# Altium PCB PCB8.PcbDoc
Units mil, origin at the board's own origin, x right, y up, seen from the top; angles counter-clockwise.
Board outline 3940 x 3150 mil, 2 copper layers (Top Layer, Bottom Layer); 95 components, 61 nets, 314 pads, 77 vias.
Unrouted connection lines stored in the file: 1.
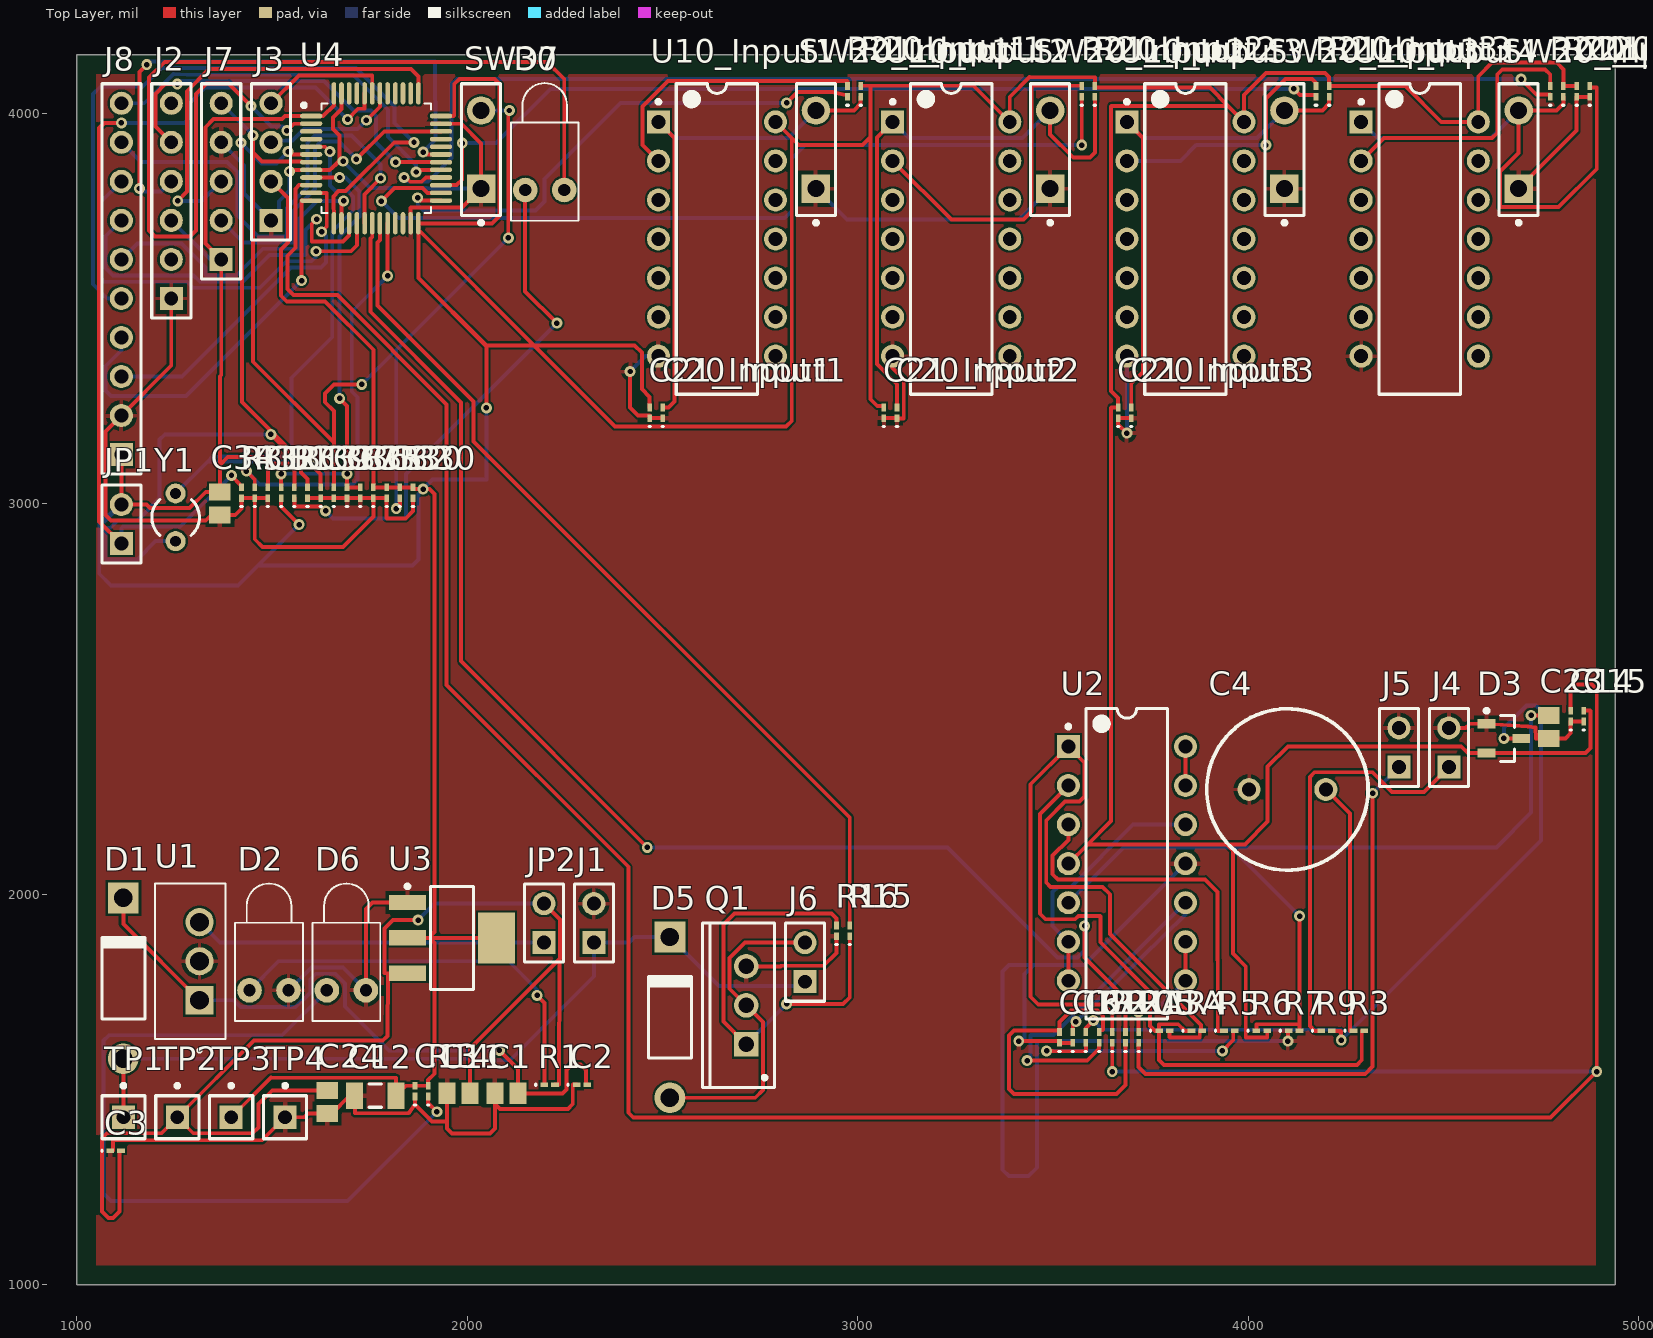
[diagram p0: Top Layer view]
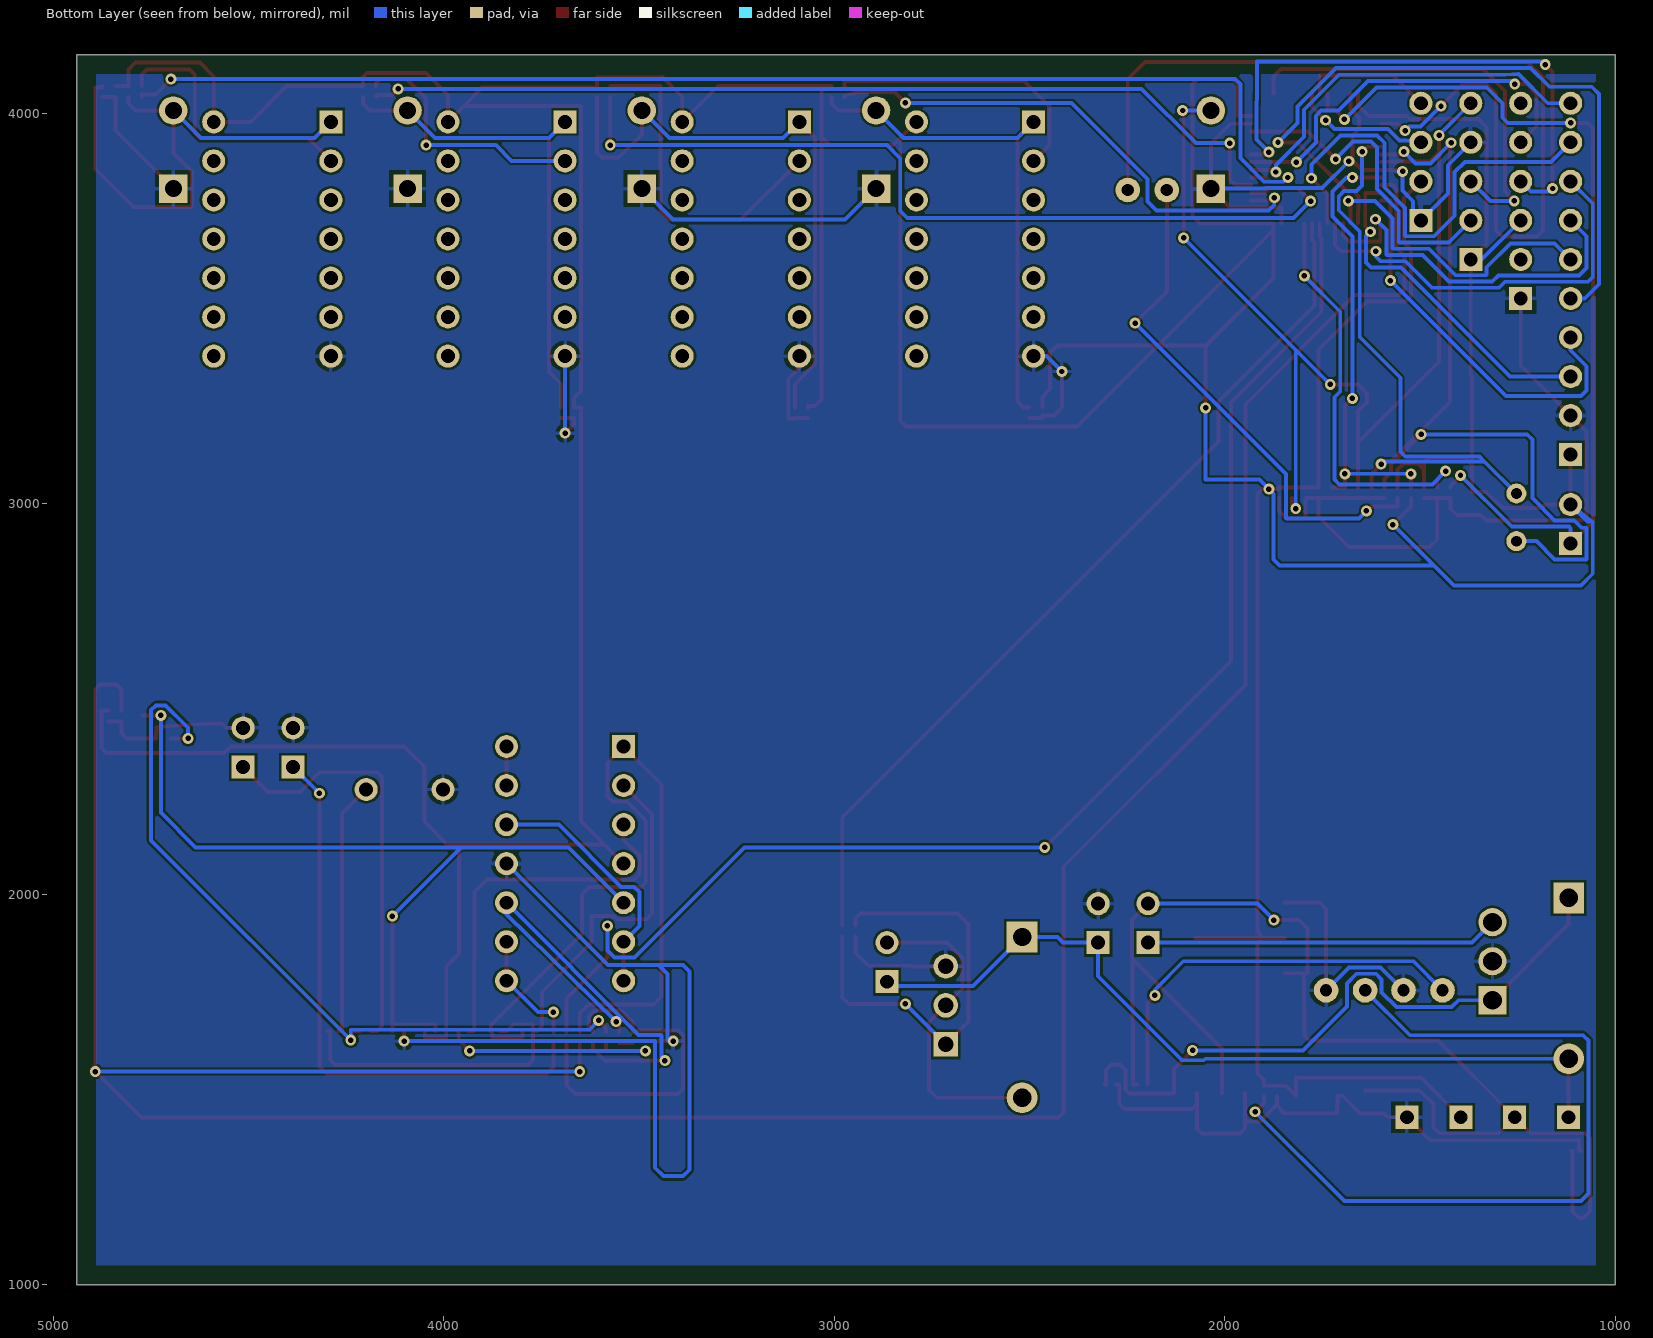
[diagram p1: Bottom Layer view, seen from below]

## Layer stack, top to bottom
Top Solder: solder mask 0.4, Solder Resist, Dk 3.5
Top Layer: signal copper 1.4
Dielectric 1: dielectric 12.6, FR-4, Dk 4.8
Bottom Layer: signal copper 1.4
Bottom Solder: solder mask 0.4, Solder Resist, Dk 3.5

## Board outline
1000,1000 1000,4150 4940,4150 4940,1000

## Design rules (kind name [scope] priority, off if disabled: settings)
Clearance [All] p1: gap=6 ignorepadtopadclearanceinfootprint=FALSE
HoleSize [All] p1: absolutevalues=TRUE maxlimit=250 minlimit=8 maxpercent=80.000 minpercent=20.000
MinimumSolderMaskSliver [All] p1: minsoldermaskwidth=4
PolygonConnect [All] p1: connectstyle=Relief reliefconductorwidth=10 reliefentries=4 polygonreliefangle="90 Angle" airgapwidth=10
RoomDefinition "Room Power (Power)" [InComponentClass('Power') vs True] p1: confinementstyle=ConfineIn formatcopy=TRUE lockcomponents=FALSE outline 1050,1050 2400,1050 2400,2050 1050,2050
RoomDefinition "Room Mcu (Mcu)" [InComponentClass('Mcu') vs True] p2: confinementstyle=ConfineIn formatcopy=TRUE lockcomponents=FALSE outline 1050,2100 2400,2100 2400,4100 1050,4100
RoomDefinition "Room Driver (Driver)" [InComponentClass('Driver') vs True] p3: confinementstyle=ConfineIn formatcopy=TRUE lockcomponents=FALSE outline 2450,1050 3450,1050 3450,1950 2450,1950
RoomDefinition "Room Analog (Analog)" [InComponentClass('Analog') vs True] p4: confinementstyle=ConfineIn formatcopy=TRUE lockcomponents=FALSE outline 3500,1050 4900,1050 4900,2500 3500,2500
RoomDefinition "Room Input1 (Input1)" [InComponentClass('Input1') vs True] p5: confinementstyle=ConfineIn formatcopy=TRUE lockcomponents=FALSE outline 2450,2600 3050,2600 3050,4100 2450,4100
RoomDefinition "Room Input2 (Input2)" [InComponentClass('Input2') vs True] p6: confinementstyle=ConfineIn formatcopy=TRUE lockcomponents=FALSE outline 3050,2600 3650,2600 3650,4100 3050,4100
RoomDefinition "Room Input3 (Input3)" [InComponentClass('Input3') vs True] p7: confinementstyle=ConfineIn formatcopy=TRUE lockcomponents=FALSE outline 3650,2600 4250,2600 4250,4100 3650,4100
RoomDefinition "Room Input4 (Input4)" [InComponentClass('Input4') vs True] p8: confinementstyle=ConfineIn formatcopy=TRUE lockcomponents=FALSE outline 4250,2600 4900,2600 4900,4100 4250,4100
RoutingVias [All] p1: holewidth=14 width=28 viastyle="Through Hole" minholewidth=10 minwidth=20 maxholewidth=28 maxwidth=50
SolderMaskExpansion [All] p1: expansion=0 istentingtop=FALSE
Width [All] p1: maxlimit=50 minlimit=6 preferedwidth=10
28 further rules are at their usual default settings.

## Classes and differential pairs
channel class Input: Input1 Input2 Input3 Input4
component class Power: C1 C2 C3 C11 C12 C13 C24 D1 D2 D6 J1 JP2 R1 R14 TP1 TP2 TP3 TP4 U1 U3
component class Mcu: C30 C31 C32 C33 C34 C35 C36 C37 C38 C39 D7 FB1 J2 J3 J7 J8 JP1 R30 R31 R32 R33 SW30 U4 Y1
component class Input4: C20_Input4 C21_Input4 R20_Input4 R21_Input4 SW20_Input4 U10_Input4
component class Input3: C20_Input3 C21_Input3 R20_Input3 R21_Input3 SW20_Input3 U10_Input3
component class Input2: C20_Input2 C21_Input2 R20_Input2 R21_Input2 SW20_Input2 U10_Input2
component class Input1: C20_Input1 C21_Input1 R20_Input1 R21_Input1 SW20_Input1 U10_Input1
component class Driver: D5 J6 Q1 R15 R16
component class Analog: C4 C5 C14 C15 C16 C17 C22 C23 D3 J4 J5 R3 R4 R5 R6 R7 R9 R10 R11 R12A R13A U2

## Components (designator, comment, footprint, x,y, rotation, side; value= is the part's Value field where it differs from the comment)
C1 "Cap" C0805 2100.24,1490.9 r0 top value=10uF
C2 "Cap" 0603 2293.78,1512.56 r0 top value=100nF
C3 "Cap" 0603 1099.37,1342.95 r0 top value=100nF
C4 "Cap Pol1" RB5-10.5 4100.67,2268.39 r0 top value=47uF
C5 "Cap" 0603 3785.83,1649.96 r0 top value=3.3nF
C11 "Cap" C0805 1977.87,1490.9 r0 top value=10uF
C12 "Cap" C1206 1764.33,1484.01 r0 top value=22uF
C13 "Cap" 0603 1866.02,1495.82 r90 top value=100nF
C14 "Cap" 0603 4825.87,2456.38 r90 top value=1nF
C15 "Cap" 0603 4859.65,2456.38 r90 top value=100nF
C16 "Cap" 0603 3516.89,1633.23 r90 top value=100nF
C17 "Cap" 0603 3550.67,1633.23 r90 top value=100nF
C20_Input1 "Cap" 0603 2500.67,3233.23 r90 top value=100nF (schematic designator C20)
C20_Input2 "Cap" 0603 3100.67,3233.23 r90 top value=100nF (schematic designator C20)
C20_Input3 "Cap" 0603 3700.67,3233.23 r90 top value=100nF (schematic designator C20)
C20_Input4 "Cap" 0603 4875.16,4056.38 r90 top value=100nF (schematic designator C20)
C21_Input1 "Cap" 0603 2466.89,3233.23 r90 top value=100nF (schematic designator C21)
C21_Input2 "Cap" 0603 3066.89,3233.23 r90 top value=100nF (schematic designator C21)
C21_Input3 "Cap" 0603 3666.89,3233.23 r90 top value=100nF (schematic designator C21)
C21_Input4 "Cap" 0603 4841.38,4056.38 r90 top value=100nF (schematic designator C21)
C22 "Cap" 0603 3584.45,1633.23 r90 top value=1uF
C23 "Cap" C0805 4770.43,2428.82 r90 top value=10uF
C24 "Cap" C0805 1640.99,1468.27 r90 top value=10uF
C30 "Cap" 0603 1860.91,3028.5 r90 top value=100nF
C31 "Cap" 0603 1489.33,3028.5 r90 top value=100nF
C32 "Cap" 0603 1793.35,3028.5 r90 top value=100nF
C33 "Cap" 0603 1759.57,3028.5 r90 top value=100nF
C34 "Cap" C0805 1366.34,3000.95 r90 top value=4.7uF
C35 "Cap" 0603 1725.79,3028.5 r90 top value=1uF
C36 "Cap" 0603 1692.01,3028.5 r90 top value=100nF
C37 "Cap" 0603 1658.23,3028.5 r90 top value=100nF
C38 "Cap" 0603 1624.45,3028.5 r90 top value=22pF
C39 "Cap" 0603 1590.67,3028.5 r90 top value=22pF
D1 "Diode 1N4007" DO-41 1119.06,1784.72 r90 top
D2 "LED1" LED-1 1492.14,1753.88 r90 top
D3 "BAT54S" SOT-23_N 4654.96,2399.29 r0 top
D5 "Diode 1N4007" DO-41 2519.06,1684.72 r90 top
D6 "LED1" LED-1 1690.37,1753.88 r90 top
D7 "LED1" LED-1 2198.25,3803.88 r90 top
FB1 "Inductor" 0603 1523.11,3028.5 r90 top value=120R@100MHz
J1 "Header 2" HDR1X2 2324.13,1876.06 r90 top
J2 "Header 6" HDR1X6 1241.81,3526.06 r90 top
J3 "Header 4" HDR1X4 1497.56,3726.06 r90 top
J4 "Header 2" HDR1X2 4514.1,2326.06 r90 top
J5 "Header 2" HDR1X2 4386.22,2326.06 r90 top
J6 "Header 2" HDR1X2 2864.96,1776.06 r90 top
J7 "Header 5" HDR1X5 1369.68,3626.06 r90 top
J8 "Header 10" HDR1X10 1113.94,3126.06 r90 top
JP1 "Header 2" HDR1X2 1113.94,2898.19 r90 top
JP2 "Header 2" HDR1X2 2196.26,1876.06 r90 top
Q1 "IRLZ44N" TO-220AB 2714.25,1715.43 r90 top
R1 "Res1" 0603 2210.79,1512.56 r0 top value=1k
R3 "Res1" 0603 4283.78,1649.96 r0 top value=1k
R4 "Res1" 0603 3868.82,1649.96 r0 top value=6.8k
R5 "Res1" 0603 3951.81,1649.96 r0 top value=100k
R6 "Res1" 0603 4034.8,1649.96 r0 top value=10k
R7 "Res1" 0603 4117.8,1649.96 r0 top value=10k
R9 "Res1" 0603 4200.79,1649.96 r0 top value=1k
R10 "Res1" 0603 3652.01,1633.23 r90 top value=100
R11 "Res1" 0603 3685.79,1633.23 r90 top value=10k
R12A "Res1" 0603 3618.23,1633.23 r90 top value=10k
R13A "Res1" 0603 3719.57,1633.23 r90 top value=100
R14 "Res1" 0603 1899.8,1495.82 r90 top value=1k
R15 "Res1" 0603 2979.57,1906.38 r90 top value=100
R16 "Res1" 0603 2945.79,1906.38 r90 top value=10k
R20_Input1 "Res1" 0603 3007.6,4056.38 r90 top value=10k (schematic designator R20)
R20_Input2 "Res1" 0603 3607.6,4056.38 r90 top value=10k (schematic designator R20)
R20_Input3 "Res1" 0603 4207.6,4056.38 r90 top value=10k (schematic designator R20)
R20_Input4 "Res1" 0603 4807.6,4056.38 r90 top value=10k (schematic designator R20)
R21_Input1 "Res1" 0603 2973.82,4056.38 r90 top value=100 (schematic designator R21)
R21_Input2 "Res1" 0603 3573.82,4056.38 r90 top value=100 (schematic designator R21)
R21_Input3 "Res1" 0603 4173.82,4056.38 r90 top value=100 (schematic designator R21)
R21_Input4 "Res1" 0603 4773.82,4056.38 r90 top value=100 (schematic designator R21)
R30 "Res1" 0603 1827.13,3028.5 r90 top value=10k
R31 "Res1" 0603 1421.77,3028.5 r90 top value=10k
R32 "Res1" 0603 1455.55,3028.5 r90 top value=10k
R33 "Res1" 0603 1556.89,3028.5 r90 top value=1k
SW20_Input1 "SW-PB" SPST-2 2892.99,3907.56 r90 top (schematic designator SW20)
SW20_Input2 "SW-PB" SPST-2 3492.99,3907.56 r90 top (schematic designator SW20)
SW20_Input3 "SW-PB" SPST-2 4092.99,3907.56 r90 top (schematic designator SW20)
SW20_Input4 "SW-PB" SPST-2 4692.99,3907.56 r90 top (schematic designator SW20)
SW30 "SW-PB" SPST-2 2035.2,3907.56 r90 top
TP1 "Plug" PIN1 1119.05,1428.9 r0 top
TP2 "Plug" PIN1 1257.17,1428.9 r0 top
TP3 "Plug" PIN1 1395.28,1428.9 r0 top
TP4 "Plug" PIN1 1533.39,1428.9 r0 top
U1 "LM7805T" TO254P1011X457X1950-3 1290.57,1828.48 r90 top
U2 "MCP6004" DIP-14 3689.53,2078.42 r0 top
U3 "AMS1117-3.3" SOT223_N 1960.9,1888.27 r0 top
U4 "STM32F103C8T6" LQFP48_7x7 1766.38,3885.12 r0 top
U10_Input1 "74HC14" DIP-14 2639.53,3678.42 r0 top (schematic designator U10)
U10_Input2 "74HC14" DIP-14 3239.53,3678.42 r0 top (schematic designator U10)
U10_Input3 "74HC14" DIP-14 3839.53,3678.42 r0 top (schematic designator U10)
U10_Input4 "74HC14" DIP-14 4439.53,3678.42 r0 top (schematic designator U10)
Y1 "XTAL" R38 1252.84,2965.51 r0 top

## Footprints (in the part's own frame and the unit in brackets; to place one, negate y for a bottom-side part, rotate by r counter-clockwise, add the part's x,y. Pads: shape width x height; smd on the part's side, far side on the other; paste and mask are expansions set on the pad)
0603 [mm] "Chip Inductor, Body 0.6x0.3mm, IPC High Density"
  rect 0.5x0.3 smd: 1(-0.35,0) 2(0.35,0)
  silkscreen extent -0.9,-0.05 -0.9,0.05, body extent -0.33,-0.18 0.33,0.18, height 0.55
C0805 [mm] "Chip Capacitor, Body 2.0x1.3mm, IPC High Density"
  rect 1.1x1.4 smd: 1(-0.75,0) 2(0.75,0)
  body extent -1.1,-0.72 1.1,0.72, height 1.4
C1206 [mm] "Chip Capacitor, Body 3.2x1.6mm, IPC High Density"
  rect 1.1x1.7 smd: 1(-1.35,0) 2(1.35,0)
  silkscreen extent -0.4,-0.75 0.4,0.75, body extent -1.7,-0.9 1.7,0.9, height 1.3
DIP-14 [mm] "DIP; 14 Leads; Row Spacing 7.62 mm; Pitch 2.54 mm"
  rect 1.5x1.5 hole 0.9: 1(-3.81,7.62)
  round 1.5 hole 0.9: 2(-3.81,5.08) 3(-3.81,2.54) 4(-3.81,0) 5(-3.81,-2.54) 6(-3.81,-5.08) 7(-3.81,-7.62) 8(3.81,-7.62) 9(3.81,-5.08) 10(3.81,-2.54) 11(3.81,0) 12(3.81,2.54) 13(3.81,5.08) 14(3.81,7.62)
  silkscreen extent -3.93,-10.1 2.65,10.1, body extent -3.6,-10.1 3.6,10.1, height 5.08
DO-41 [mm] "Diode, Axial; Body 5.2 x 2.7 mm (LxDia. max), Lead Dia. 0.86 mm (max)"
  round 2 hole 1.2: 1(-5.23,0)
  rect 2x2 hole 1.2: 2(5.23,0)
  silkscreen extent -2.65,-1.4 2.75,1.4
HDR1X2 [mm] "Connector; Header; 2 Position"
  rect 1.5x1.5 hole 0.9: 1(0,0)
  round 1.5 hole 0.9: 2(2.54,0)
  silkscreen extent -1.27,-1.27 3.81,1.27
HDR1X4 [mm] "Connector; Header; 4 Position"
  rect 1.5x1.5 hole 0.9: 1(0,0)
  round 1.5 hole 0.9: 2(2.54,0) 3(5.08,0) 4(7.62,0)
  silkscreen extent -1.27,-1.27 8.89,1.27
HDR1X5 [mm] "Connector; Header; 5 Position"
  rect 1.5x1.5 hole 0.9: 1(0,0)
  round 1.5 hole 0.9: 2(2.54,0) 3(5.08,0) 4(7.62,0) 5(10.16,0)
  silkscreen extent -1.27,-1.27 11.43,1.27
HDR1X6 [mm] "Connector; Header; 6 Position"
  rect 1.5x1.5 hole 0.9: 1(0,0)
  round 1.5 hole 0.9: 2(2.54,0) 3(5.08,0) 4(7.62,0) 5(10.16,0) 6(12.7,0)
  silkscreen extent -1.27,-1.27 13.97,1.27
HDR1X10 [mm] "Connector; Header; 10 Position"
  rect 1.5x1.5 hole 0.9: 1(0,0)
  round 1.5 hole 0.9: 2(2.54,0) 3(5.08,0) 4(7.62,0) 5(10.16,0) 6(12.7,0) 7(15.24,0) 8(17.78,0) 9(20.32,0) 10(22.86,0)
  silkscreen extent -1.27,-1.27 24.13,1.27
LED-1 [mm] "LED; 2 Leads"
  round 1.6 hole 0.8: 1(0,1.27) 2(0,-1.27)
  silkscreen extent -2,-2.2 6.95,2.2
LQFP48_7x7 [mm] "TSQFP, 48-Leads, Body 7.00x7.00mm, Pitch 0.50mm, IPC Medium Density"
  oval 1.45x0.3 smd: 1(-4.225,2.75) 2(-4.225,2.25) 3(-4.225,1.75) 4(-4.225,1.25) 5(-4.225,0.75) 6(-4.225,0.25) 7(-4.225,-0.25) 8(-4.225,-0.75) 9(-4.225,-1.25) 10(-4.225,-1.75) 11(-4.225,-2.25) 12(-4.225,-2.75) 25(4.225,-2.75) 26(4.225,-2.25) 27(4.225,-1.75) 28(4.225,-1.25) 29(4.225,-0.75) 30(4.225,-0.25) 31(4.225,0.25) 32(4.225,0.75) 33(4.225,1.25) 34(4.225,1.75) 35(4.225,2.25) 36(4.225,2.75)
  oval 0.3x1.45 smd: 13(-2.75,-4.225) 14(-2.25,-4.225) 15(-1.75,-4.225) 16(-1.25,-4.225) 17(-0.75,-4.225) 18(-0.25,-4.225) 19(0.25,-4.225) 20(0.75,-4.225) 21(1.25,-4.225) 22(1.75,-4.225) 23(2.25,-4.225) 24(2.75,-4.225) 37(2.75,4.225) 38(2.25,4.225) 39(1.75,4.225) 40(1.25,4.225) 41(0.75,4.225) 42(0.25,4.225) 43(-0.25,4.225) 44(-0.75,4.225) 45(-1.25,4.225) 46(-1.75,4.225) 47(-2.25,4.225) 48(-2.75,4.225)
  silkscreen extent -4.82,-3.56 3.56,3.57, body extent -3.5,-3.5 3.5,3.5, height 1.6
PIN1 [mm] "Connector; Plug"
  rect 1.5x1.5 hole 0.9: 1(0,0)
  silkscreen extent -1.4,-1.4 1.4,2.17
R38 [mm] "Crystal, Thru-Hole; 2 Leads; Body 3.1 x 8.2 mm (Dia.xH)"
  round 1.3 hole 0.7: 1(0,1.55) 2(0,-1.55)
  silkscreen extent -1.55,-1.19 1.55,1.17
RB5-10.5 [mm] "Capacitor (Radial); 2 Leads"
  round 1.5 hole 0.9: 1(-2.5,0) 2(2.5,0)
  silkscreen extent -5.25,-5.25 5.25,5.25
SOT223_N [mm] "SOT223, 4-Leads, Body 6.5x3.5mm, Pitch 2.3mm, Lead Span 7mm, IPC Medium Density"
  rect 2.4x1 smd: 1(-2.9,2.3) 2(-2.9,0) 3(-2.9,-2.3)
  rect 2.4x3.3 smd: 4(2.9,0)
  silkscreen extent -3.02,-3.35 1.4,3.47, body extent -1.85,-3.35 1.85,3.35, height 1.7
SOT-23_N [mm] "SOT23, 3-Leads, Body 2.9x1.3mm, Pitch 0.95mm, Lead Span 2.5mm, IPC Medium Density"
  rect 1.15x0.6 smd: 1(-1.125,0.95) 2(-1.125,-0.95) 3(1.125,0)
  silkscreen extent -1.25,-1.5 0.7,1.92, body extent -0.7,-1.5 0.7,1.5, height 1.1
SPST-2 [mm] "Switch; 2 Leads"
  rect 1.85x1.85 hole 1.1: 1(-2.54,0)
  round 1.85 hole 1.1: 2(2.54,0)
  silkscreen extent -4.89,-1.27 4.28,1.27
TO254P1011X457X1950-3 [mm]
  rect 1.83x1.83 / inner round 1.83 / far side rect 1.83x1.83 hole 1.22 mask+0.102: 1(-2.54,-0.6)
  round 1.83 hole 1.22 mask+0.102: 2(0,-0.6) 3(2.54,-0.6)
  silkscreen extent -5.9,-2.28 5.05,2.28, body extent -5.08,-2.28 5.08,2.28, height 19.5
TO-220AB [mm] "TO, Thru-Hole, Vertical, Heatsink Mounted; 3 In-Line Leads; Pitch 2.54 mm"
  rect 1.6x1.6 hole 1: 1(-2.54,0)
  round 1.6 hole 1: 2(0,0) 3(2.54,0)
  silkscreen extent -5.35,-1.85 5.35,2.85, body extent -5.4,-1.9 5.4,2.9, height 19.3

## Part data
C1 C11 C23 C24: "Capacitor 10uF", Manufacturer=KEMET, Manufacturer Part Number=C0805C10610uF, LatestRevisionDate=17-Jul-2002, LatestRevisionNote="Re-released for DXP Platform.", PackageDescription="Radial Cap, Thru-Hole; 2 Leads; 0.3 in Pin Spacing", PackageReference=RAD-0.3, Published=8-Jun-2000, Publisher="Altium Limited"
C2 C3 C13 C15 C16 C17 C20_Input1 C20_Input2 C20_Input3 C20_Input4 C21_Input1 C21_Input2 C21_Input3 C21_Input4 C30 C31 C32 C33 C36 C37: "Capacitor 100nF", Manufacturer=KEMET, Manufacturer Part Number=C0603C100nF, LatestRevisionDate=17-Jul-2002, LatestRevisionNote="Re-released for DXP Platform.", PackageDescription="Radial Cap, Thru-Hole; 2 Leads; 0.3 in Pin Spacing", PackageReference=RAD-0.3, Published=8-Jun-2000, Publisher="Altium Limited"
C4: "Electrolitico 47 uF 16 V (polo del lazo 3.4 Hz)", Manufacturer=Panasonic, Manufacturer Part Number=EEU-FR1C470, LatestRevisionDate=17-Jul-2002, LatestRevisionNote="Re-released for DXP Platform.", PackageDescription="Polarized Capacitor (Radial); 2 Leads", PackageReference=RB7.6-15, Published=8-Jun-2000, Publisher="Altium Limited"
C5: "Capacitor 3.3nF", Manufacturer=KEMET, Manufacturer Part Number=C0603C3323.3nF, LatestRevisionDate=17-Jul-2002, LatestRevisionNote="Re-released for DXP Platform.", PackageDescription="Radial Cap, Thru-Hole; 2 Leads; 0.3 in Pin Spacing", PackageReference=RAD-0.3, Published=8-Jun-2000, Publisher="Altium Limited"
C12: "Capacitor 22uF", Manufacturer=KEMET, Manufacturer Part Number=C1206C22622uF, LatestRevisionDate=17-Jul-2002, LatestRevisionNote="Re-released for DXP Platform.", PackageDescription="Radial Cap, Thru-Hole; 2 Leads; 0.3 in Pin Spacing", PackageReference=RAD-0.3, Published=8-Jun-2000, Publisher="Altium Limited"
C14: "Capacitor 1nF", Manufacturer=KEMET, Manufacturer Part Number=C0603C1021nF, LatestRevisionDate=17-Jul-2002, LatestRevisionNote="Re-released for DXP Platform.", PackageDescription="Radial Cap, Thru-Hole; 2 Leads; 0.3 in Pin Spacing", PackageReference=RAD-0.3, Published=8-Jun-2000, Publisher="Altium Limited"
C22 C35: "Capacitor 1uF", Manufacturer=KEMET, Manufacturer Part Number=C0603C1051uF, LatestRevisionDate=17-Jul-2002, LatestRevisionNote="Re-released for DXP Platform.", PackageDescription="Radial Cap, Thru-Hole; 2 Leads; 0.3 in Pin Spacing", PackageReference=RAD-0.3, Published=8-Jun-2000, Publisher="Altium Limited"
C34: "Capacitor 4.7uF", Manufacturer=KEMET, Manufacturer Part Number=C0805C4754.7uF, LatestRevisionDate=17-Jul-2002, LatestRevisionNote="Re-released for DXP Platform.", PackageDescription="Radial Cap, Thru-Hole; 2 Leads; 0.3 in Pin Spacing", PackageReference=RAD-0.3, Published=8-Jun-2000, Publisher="Altium Limited"
C38 C39: "Capacitor 22pF", Manufacturer=KEMET, Manufacturer Part Number=C0603C22022pF, LatestRevisionDate=17-Jul-2002, LatestRevisionNote="Re-released for DXP Platform.", PackageDescription="Radial Cap, Thru-Hole; 2 Leads; 0.3 in Pin Spacing", PackageReference=RAD-0.3, Published=8-Jun-2000, Publisher="Altium Limited"
D1: "Proteccion de polaridad inversa", Manufacturer="Diodes Inc.", Manufacturer Part Number=1N4007, Code_JEDEC=DO-204-AL, ComponentLink1Description="Manufacturer Link", ComponentLink1URL=http://www.fairchildsemi.com/, ComponentLink2Description=Datasheet, ComponentLink2URL=http://www.fairchildsemi.com/ds/1N%2F1N4001.pdf, DatasheetVersion=1998, LatestRevisionDate=17-Jul-2002, LatestRevisionNote="Re-released for DXP Platform.", PackageDescription="Diode, Axial; Body 5.2 x 2.7 mm (LxDia. max), Lead Dia. 0.86 mm (max)", PackageReference=DO-41, PackageVersion=Aug-1999, Published=8-Jun-2000, Publisher="Altium Limited"
D2: "LED de alimentacion (5 V)", Manufacturer=Kingbright, Manufacturer Part Number=WP7113ID, LatestRevisionDate=08-Jul-2005, LatestRevisionNote="Mech Layer 1 removed.", PackageDescription="LED; 2 Leads", PackageReference=LED-1, Published=8-Jun-2000, Publisher="Altium Limited"
D3: "Dual Schottky series pair SOT-23 (clamp)", Manufacturer=Nexperia, Manufacturer Part Number=BAT54S
D5: "Rueda libre en paralelo con la carga", Manufacturer="Diodes Inc.", Manufacturer Part Number=1N4007, Code_JEDEC=DO-204-AL, ComponentLink1Description="Manufacturer Link", ComponentLink1URL=http://www.fairchildsemi.com/, ComponentLink2Description=Datasheet, ComponentLink2URL=http://www.fairchildsemi.com/ds/1N%2F1N4001.pdf, DatasheetVersion=1998, LatestRevisionDate=17-Jul-2002, LatestRevisionNote="Re-released for DXP Platform.", PackageDescription="Diode, Axial; Body 5.2 x 2.7 mm (LxDia. max), Lead Dia. 0.86 mm (max)", PackageReference=DO-41, PackageVersion=Aug-1999, Published=8-Jun-2000, Publisher="Altium Limited"
D6: "LED de alimentacion (3.3 V)", Manufacturer=Kingbright, Manufacturer Part Number=WP7113GD, LatestRevisionDate=08-Jul-2005, LatestRevisionNote="Mech Layer 1 removed.", PackageDescription="LED; 2 Leads", PackageReference=LED-1, Published=8-Jun-2000, Publisher="Altium Limited"
D7: "LED de usuario (PC13 sumidero)", Manufacturer=Kingbright, Manufacturer Part Number=WP7113ID, LatestRevisionDate=08-Jul-2005, LatestRevisionNote="Mech Layer 1 removed.", PackageDescription="LED; 2 Leads", PackageReference=LED-1, Published=8-Jun-2000, Publisher="Altium Limited"
FB1: "Ferrite bead VDD -> VDDA", Manufacturer=Murata, Manufacturer Part Number=BLM18PG121SN1D, Code_IEC=1005, Code_JEITA=0402, LatestRevisionDate=29-May-2009, LatestRevisionNote="IPC-7351 Footprint Added.", PackageDescription="Chip Inductor", PackageReference=0402-A, Published=8-Jun-2000, Publisher="Altium Limited"
J1: "Entrada 9-12 V DC: pin1 VIN, pin2 GND", Manufacturer=Generic, Manufacturer Part Number="Pin header 1x2 / borne", LatestRevisionDate=17-Jul-2002, LatestRevisionNote="Re-released for DXP Platform.", Publisher="Altium Limited"
J2: "UART FTDI: GND, -, 3V3, RX, TX, -", Manufacturer=Generic, Manufacturer Part Number="Pin header 1x6 FTDI", LatestRevisionDate=17-Jul-2002, LatestRevisionNote="Re-released for DXP Platform.", Publisher="Altium Limited"
J3: "I2C: GND, 3V3, SCL, SDA", Manufacturer=Generic, Manufacturer Part Number="Pin header 1x4", LatestRevisionDate=17-Jul-2002, LatestRevisionNote="Re-released for DXP Platform.", Publisher="Altium Limited"
J4: "Entrada analogica +-200 mV: pin1 senal, pin2 GND", Manufacturer=Generic, Manufacturer Part Number="Pin header 1x2", LatestRevisionDate=17-Jul-2002, LatestRevisionNote="Re-released for DXP Platform.", Publisher="Altium Limited"
J5: "Salida analogica 0-3.3 V: pin1 VOUT, pin2 GND", Manufacturer=Generic, Manufacturer Part Number="Pin header 1x2", LatestRevisionDate=17-Jul-2002, LatestRevisionNote="Re-released for DXP Platform.", Publisher="Altium Limited"
J6: "Carga externa: pin1 VIN, pin2 DRAIN", Manufacturer=Generic, Manufacturer Part Number="Pin header 1x2 / borne", LatestRevisionDate=17-Jul-2002, LatestRevisionNote="Re-released for DXP Platform.", Publisher="Altium Limited"
J7: "SWD: 3V3, SWDIO, SWCLK, GND, NRST", Manufacturer=Generic, Manufacturer Part Number="Pin header 1x5", LatestRevisionDate=17-Jul-2002, LatestRevisionNote="Re-released for DXP Platform.", Publisher="Altium Limited"
J8: "Expansion: 3V3, GND, PA1-PA4, SPI SCK/MISO/MOSI, PA8", Manufacturer=Generic, Manufacturer Part Number="Pin header 1x10", LatestRevisionDate=17-Jul-2002, LatestRevisionNote="Re-released for DXP Platform.", Publisher="Altium Limited"
JP1: "Jumper BOOT0: cerrado = bootloader UART", Manufacturer=Generic, Manufacturer Part Number="Pin header 1x2", LatestRevisionDate=17-Jul-2002, LatestRevisionNote="Re-released for DXP Platform.", Publisher="Altium Limited"
JP2: "Jumper de separacion entre etapas", Manufacturer=Generic, Manufacturer Part Number="Pin header 1x2", LatestRevisionDate=17-Jul-2002, LatestRevisionNote="Re-released for DXP Platform.", Publisher="Altium Limited"
Q1: "N-MOSFET logic-level 55 V 47 A TO-220 (G,D,S)", Manufacturer=Infineon, Manufacturer Part Number=IRLZ44NPBF
R1 R3 R9 R14 R33: "Resistor 1k 0603", Manufacturer=Yageo, Manufacturer Part Number=RC0603FR-071K, LatestRevisionDate=17-Jul-2002, LatestRevisionNote="Re-released for DXP Platform.", PackageDescription="Axial Device, Thru-Hole; 2 Leads; 0.3 in Pin Spacing", PackageReference=AXIAL-0.3, Published=8-Jun-2000, Publisher="Altium Limited"
R4: "Resistor 6.8k 0603", Manufacturer=Yageo, Manufacturer Part Number=RC0603FR-076.8K, LatestRevisionDate=17-Jul-2002, LatestRevisionNote="Re-released for DXP Platform.", PackageDescription="Axial Device, Thru-Hole; 2 Leads; 0.3 in Pin Spacing", PackageReference=AXIAL-0.3, Published=8-Jun-2000, Publisher="Altium Limited"
R5: "Resistor 100k 0603", Manufacturer=Yageo, Manufacturer Part Number=RC0603FR-07100K, LatestRevisionDate=17-Jul-2002, LatestRevisionNote="Re-released for DXP Platform.", PackageDescription="Axial Device, Thru-Hole; 2 Leads; 0.3 in Pin Spacing", PackageReference=AXIAL-0.3, Published=8-Jun-2000, Publisher="Altium Limited"
R6 R7 R11 R12A R16 R20_Input1 R20_Input2 R20_Input3 R20_Input4 R30 R31 R32: "Resistor 10k 0603", Manufacturer=Yageo, Manufacturer Part Number=RC0603FR-0710K, LatestRevisionDate=17-Jul-2002, LatestRevisionNote="Re-released for DXP Platform.", PackageDescription="Axial Device, Thru-Hole; 2 Leads; 0.3 in Pin Spacing", PackageReference=AXIAL-0.3, Published=8-Jun-2000, Publisher="Altium Limited"
R10 R13A R15 R21_Input1 R21_Input2 R21_Input3 R21_Input4: "Resistor 100 0603", Manufacturer=Yageo, Manufacturer Part Number=RC0603FR-07100, LatestRevisionDate=17-Jul-2002, LatestRevisionNote="Re-released for DXP Platform.", PackageDescription="Axial Device, Thru-Hole; 2 Leads; 0.3 in Pin Spacing", PackageReference=AXIAL-0.3, Published=8-Jun-2000, Publisher="Altium Limited"
SW20_Input1 SW20_Input2 SW20_Input3 SW20_Input4: "Pulsador NA", Manufacturer=Generic, Manufacturer Part Number="Tactile 6x6", LatestRevisionDate=17-Jul-2002, LatestRevisionNote="Re-released for DXP Platform.", PackageDescription="Switch; 2 Leads", PackageReference=SPST-2, Published=24-Mar-1999, Publisher="Altium Limited"
SW30: "Reset manual", Manufacturer=Generic, Manufacturer Part Number="Tactile 6x6", LatestRevisionDate=17-Jul-2002, LatestRevisionNote="Re-released for DXP Platform.", PackageDescription="Switch; 2 Leads", PackageReference=SPST-2, Published=24-Mar-1999, Publisher="Altium Limited"
TP1: "Punto de prueba VIN0", Manufacturer=Generic, Manufacturer Part Number="Test point", LatestRevisionDate=17-Jul-2002, LatestRevisionNote="Re-released for DXP Platform.", Publisher="Altium Limited"
TP2: "Punto de prueba +5V", Manufacturer=Generic, Manufacturer Part Number="Test point", LatestRevisionDate=17-Jul-2002, LatestRevisionNote="Re-released for DXP Platform.", Publisher="Altium Limited"
TP3: "Punto de prueba +3V3", Manufacturer=Generic, Manufacturer Part Number="Test point", LatestRevisionDate=17-Jul-2002, LatestRevisionNote="Re-released for DXP Platform.", Publisher="Altium Limited"
TP4: "Punto de prueba GND", Manufacturer=Generic, Manufacturer Part Number="Test point", LatestRevisionDate=17-Jul-2002, LatestRevisionNote="Re-released for DXP Platform.", Publisher="Altium Limited"
U1: "Regulador 5 V, 1.5 A, TO-220 (necesita disipador si Vin>9 V)", Manufacturer=STMicroelectronics, Manufacturer Part Number=L7805CV, Package="TO-220-3 TAEJIN", Check_prices=https://www.snapeda.com/parts/LM7805T/TAEJIN/view-part/?ref=eda, MF=TAEJIN, MP=LM7805T, SnapEDA_Link=https://www.snapeda.com/parts/LM7805T/TAEJIN/view-part/?ref=snap
U2: "MCP6004 quad op-amp rail-to-rail 1 MHz (A-D) + power part E, PDIP-14", Manufacturer=Microchip, Manufacturer Part Number=MCP6004-I/P
U3: "LDO 3.3 V 1 A SOT-223", Manufacturer="Advanced Monolithic Systems", Manufacturer Part Number=AMS1117-3.3
U4: "STM32F103C8T6 ARM Cortex-M3 72 MHz LQFP48", Manufacturer=STMicroelectronics, Manufacturer Part Number=STM32F103C8T6
U10_Input1 U10_Input2 U10_Input3 U10_Input4: "Hex Schmitt-trigger inverter 6 gates (A-F) + power part G (VCC=14, GND=7)", Manufacturer="Texas Instruments", Manufacturer Part Number=SN74HC14N
Y1: "Cristal 8 MHz CL=20 pF", Manufacturer=Abracon, Manufacturer Part Number=ABL-8.000MHZ-B2, LatestRevisionDate=17-Jul-2002, LatestRevisionNote="Re-released for DXP Platform.", PackageDescription="Crystal, Thru-Hole; 2 Leads; Body 3.1 x 8.2 mm (Dia.xH)", PackageReference=R38, Published=8-Jun-2000, Publisher="Altium Limited"

## Via types
v1: diameter 28, hole 14, Top Layer to Bottom Layer, 77 vias

## Nets (pads, with @x,y where several pads share a name; then routed paths per layer and width w, separated by ;. In a path a pad name is that pad's centre, name@x,y a point inside that pad or via, vN(x,y) a via of type N, cw(c..) or ccw(c..) an arc to the next point about the centre after c; other vN are vias at no path point)
+3V3: C12.2 C13.2 C15.2 C21_Input1.2 C21_Input2.2 C21_Input3.2 C21_Input4.2 C30.2 C31.2 C32.2 C33.2 C34.2 D3.2 FB1.1 J2.3 J3.2 J7.1 J8.1 JP1.2 R6.2 R14.2 R20_Input1.2 R20_Input2.2 R20_Input3.2 R20_Input4.2 R30.2 R33.2 TP3.1 U2.4 U3.2 U3.4 U4.1 U4.24 U4.36 U4.48 U10_Input1.14 U10_Input2.14 U10_Input3.14 U10_Input4.14 | length 19659
  Top Layer w10: J8.1 JP1.2 1177.81,2998.19 1187,2989 1288.53,2989 1330,3030.47 C34.2 1366.34,3100 ; TP3.1 1497.38,1531 1817.48,1530 C12.2 1843.07,1509.61 C13.2 R14.2 1899.8,1524 1916,1540.2 1916,1875 1902.73,1888.27 ; C31.2 1489.33,3087.5 ; J3.2 1540.48,3783.15 1540.48,3668.98 1523,3651.5 1523,3533 1537.5,3518.5 1635.7,3518.5 1759.57,3394.63 C33.2 C32.2 R30.2 C30.2 1860.91,3038 v1(1887,3038) 1903.5,3038 1916.5,3025 1916.5,1904.77 1902.73,1888.27 ; FB1.1 1523.11,2992.89 v1(1569,2947) ; R33.2 1556.89,3087.5 1540.87,3103.52 1505.35,3103.52 1489.33,3087.5 ; U4.48 1658.11,4020.8 1630.7,3993.39 U4.1 1532.85,3993.39 1525,3985.54 1350,3985.54 1329,3964.54 1329,3666.75 J7.1 1369.69,3329.35 1366.34,3326 1366.34,3100 ; U3.2 1902.73,1888.27 ; U4.24 U4.24@1874.65,3718 ; U4.36 1965.02,3993.39 1966.63,3995 1966.63,4075 1979.63,4088 2070,4088 2083,4075 2083,3737.5 2063.5,3718 U4.24@1874.65,3718 ; v1(2049,3246) 2049,3406 ; U3.4 1902.73,1888.27 ; C21_Input1.2 2466.89,3274.11 2447,3294 2447,3387.5 2428.5,3406 2170.63,3406 ; U10_Input1.14 2831,3936.95 ; R20_Input1.2 3007.6,4071 3033,4071 ; C21_Input2.2 3066.89,3251 3050,3251 3033,3268 3033,3939.5 ; U2.4 3589.1,2128 ; R6.2 4049,1649.96 4049,1634 4048,1633 3995,1633 3994,1634 3994,1815 3961,1848 3961,2112.5 3945.5,2128 ; C21_Input4.2 R20_Input4.2 4807.6,4112.9 4790.5,4130 4625,4130 4589.53,4094.53 U10_Input4.14 4494.57,3978.43 4403,4070 4207.6,4070 R20_Input3.2 4207.6,4093 4196.6,4104 4046.07,4104 3989.53,4047.45 U10_Input3.14 3948.95,4019 ; C15.2 4859.65,2471 4876,2471 4877,2470 4877,2375 4863.89,2361.89 D3.2 4563,2361.89 4545.89,2379 4102,2379 4050,2327 4050,2186 3992,2128 3945.5,2128 ; 1366.34,3100 1386.34,3120 1475,3120 1489.33,3105.67 1489.33,3087.5 ; 1874.65,3578 U4.24@1874.65,3701.98 ; 1874.65,3578 2049,3406 ; 1874.65,3578 2046.65,3406 2049,3406 ; U4.24@1874.65,3701.98 2170.63,3406 ; U4.24@1874.65,3701.98 U4.24@1874.65,3718 ; 2049,3406 2170.63,3406 ; 2170.63,3406 2378.63,3198 2816.5,3198 2831,3212.5 2831,3936.95 ; 2831,3936.95 2848.95,3919 3012.5,3919 3033,3939.5 ; 3033,3939.5 3033,4071 ; 3033,4071 3296.95,4071 U10_Input2.14 3389.53,4042.24 3440.29,4093 3607.6,4092 R20_Input2.2 3607.6,4066 3901.95,4066 3948.95,4019 ; 3589.1,2128 3945.5,2128 ; 3589.1,2128 3649,2187.9 3649,3246 3650,3247 C21_Input3.2 3666.89,3271 3649,3288.89 3649,4018 3650,4019 3948.95,4019
  Bottom Layer w10: J2.3 1341.81,3626.06 J7.1 ; v1(1569,2947) 1463.66,2841.66 ; v1(2049,3246) 2049,3062 1911,3062 v1(1887,3038) 1875,3026 1875,2857.5 1859.16,2841.66 1463.66,2841.66 ; 1057.41,2953.13 1059.4,2954.72 ; 1057.41,2953.13 1057.41,2821.09 1087.5,2791 1413,2791 1463.66,2841.66 ; 1057.41,2953.13 1059,2954.72 1059.4,2954.72 ; 1059.4,2954.72 JP1.2 1070.47,2954.72 1059.4,2954.72
+5V: C3.2 C11.2 C24.2 JP2.2 R1.2 TP2.1 U3.3 | length 3424.9
  Top Layer w10: C3.2 1109,1342.95 1109,1187.5 1092.5,1171 1080.5,1171 1064,1187.5 1064,1375 1077,1388 1216.27,1388 TP2.1 ; C24.2 1500.29,1497.79 1465,1462.5 1465,1403 1450,1388 1298.06,1388 TP2.1 ; U3.3 1797,1797.72 ; v1(1874,1934) 1809.5,1934 1788,1912.5 1788,1798.72 1789,1797.72 1797,1797.72 ; C11.2 2007.4,1605.4 2236.52,1834.52 ; JP2.2 2237,1935.32 2237,1835 2236.52,1834.52 ; R1.2 2235,1512.56 2236.52,1834.52 ; TP2.1 1453.27,1625 1783.5,1625 1796,1637.5 1797,1797.72
  Bottom Layer w10: v1(1874,1934) 1916.06,1976.06 JP2.2
A_C: C4.2 R3.1 | length 653.1
  Top Layer w10: C4.2 4261,2206.48 4261,1649.96 R3.1
A_C1: C22.1 R5.2 | length 637.9
  Top Layer w10: v1(3484,1599) 3499,1599 3500,1598 3583.45,1598 3584.45,1599 C22.1 ; v1(3934,1599) 3962,1627 3962,1649.96 R5.2
  Bottom Layer w10: v1(3484,1599) v1(3934,1599)
A_N: C5.1 R3.2 R4.1 U2.2 | length 1676.7
  Top Layer w10: U2.2 3467,2205.9 3467,1950 3481,1936 3557,1936 3565,1944 3621,1944 3622,1943 3622,1877 3749,1750 3749,1662.5 3761.54,1649.96 C5.1 ; R4.1 3838.04,1649.96 3821,1667 3773,1667 3772,1666 C5.1 ; R3.2 4291,1649.96 4291,1575 4278.5,1562.5 3784.5,1562.5 3772,1575 C5.1
A_OUT: C5.2 R4.2 R10.2 U2.1 | length 2123.2
  Top Layer w10: R10.2 3652.01,1695.99 3630,1718 3462.5,1718 3443,1737.5 3443,2281.9 U2.1 3581,2336.95 3581,2250 3568.45,2237.45 3531,2237.45 3483,2189.45 3483,2030 3494,2019 3627,2019 3646,2000 3646,1898.5 3879,1665.5 R4.2@3879,1649.96 ; C5.2 3799,1649.96 3799,1634 3800,1633 3875,1633 3876,1634 3876,1649.96 R4.2@3879,1649.96 ; R4.2 R4.2@3879,1649.96
A_P: R5.1 U2.3 | length 956.6
  Top Layer w10: U2.3 3539.53,2139.53 3499,2099 3499,2051.4 3512.5,2037.9 3889.1,2037.9 3921.12,2005.88 3922.16,1649.96 R5.1
ADC_IN: C14.2 R10.1 U4.10 | length 7807.5
  Top Layer w10: U4.10 1569,3816.22 1559.5,3806.72 1559.5,3656 1539,3635.5 1539,3550 1554.5,3534.5 1667.5,3534.5 1947,3255 1947,2536 2412.5,2070.5 2412.5,1440.5 2425,1428 4775.01,1428 v1(4893,1545.99) 4893,2525 4880.5,2537.5 4838.37,2537.5 4825.87,2525 C14.2 ; v1(3652.01,1545.99) R10.1
  Bottom Layer w10: v1(3652.01,1545.99) v1(4893,1545.99)
AIN: J4.1 R9.1 | length 1080.4
  Top Layer w10: R9.1 4170.54,1649.96 4158,1662.5 4158,2300 4170.5,2312.5 4318.5,2312.5 4369,2262 4450.03,2262 J4.1
AIN_P: C22.2 D3.3 R9.2 | length 2031.6
  Top Layer w10: C22.2 3584.45,1657.95 v1(3603.5,1677) ; R9.2 4237,1649.96 ; v1(4655,2399.29) D3.3 ; 4237,1649.96 v1(4238.52,1626.52) 4238.52,1648.44 4237,1649.96
  Bottom Layer w10: v1(3603.5,1677) 3627.5,1653 4238.52,1653 v1(4238.52,1626.52) 4750,2138 4750,2471.5 4737.5,2484 4712.5,2484 4655,2426.5 v1(4655,2399.29)
BOOT0: JP1.1 R31.2 U4.44 | length 2335.5
  Top Layer w10: JP1.1 1057,2955.13 1057,3962.5 1070.5,3976 v1(1114,3976) ; v1(1396,3073) 1396,3072 1421.77,3046.23 R31.2 ; v1(1693.45,3984.99) 1720.46,4012 1735.85,4012 1736.85,4013 U4.44
  Bottom Layer w10: JP1.1 1113.94,2937.5 1118.1,2941.66 1264.66,2941.66 v1(1396,3073) ; v1(1114,3976) 1275,3976 1288,3989 1288,4026 1328.8,4066.8 1611.65,4066.8 v1(1693.45,3984.99)
BOOT1: R32.2 U4.20 | length 1055.5
  Top Layer w10: v1(1434,3084) 1455.55,3062.45 R32.2 ; v1(1795.91,3584) U4.20
  Bottom Layer w10: v1(1434,3084) 1468,3050 1706.5,3050 1719,3062.5 1719,3273 1704,3288 1704,3492.09 v1(1795.91,3584)
BTN0: R21_Input1.1 U4.25 | length 1352.6
  Top Layer w10: v1(1873,3784) 1880.15,3776.85 U4.25 ; v1(2818,4027) 2846,4055 2935,4055 2973.82,4046 R21_Input1.1
  Bottom Layer w10: v1(1873,3784) 1873,3765.5 1887.5,3751 2175,3751 2198,3774 2198,3832.5 2392.5,4027 v1(2818,4027)
BTN1: R21_Input2.1 U4.26 | length 2263.7
  Top Layer w10: v1(1780,3775.5) 1813.5,3809 1885.54,3809 1898,3796.54 U4.26 ; v1(3573.82,3919) R21_Input2.1
  Bottom Layer w10: v1(1780,3775.5) 1823.5,3732 2813,3732 2831,3750 2831,3885 2865,3919 v1(3573.82,3919)
BTN2: R21_Input3.1 U4.27 | length 2408.7
  Top Layer w10: U4.27 1972,3816.22 1987,3831.22 v1(1987,3924) ; v1(4117,4063) 4133,4047 4173.82,4047 R21_Input3.1
  Bottom Layer w10: v1(1987,3924) 2074,3924 2213,4063 v1(4117,4063)
BTN3: R21_Input4.1 U4.28 | length 3286.3
  Top Layer w10: v1(1838,3835.91) 1843,3835.91 1853.91,3825 1883.09,3825 1894,3835.91 U4.28 ; v1(4699,4088) 4738,4049 4773.82,4049 R21_Input4.1
  Bottom Layer w10: v1(1838,3835.91) 1848.91,3825 1898.93,3825 1960,3886.07 1960,4075 1973,4088 v1(4699,4088)
BTN_Input1_N: R21_Input1.2 U10_Input1.2 | length 720.4
  Top Layer w10: U10_Input1.2 2449,3918.95 2449,4018 2514,4083 2972.82,4083 2973.82,4082 R21_Input1.2
BTN_Input2_N: R21_Input2.2 U10_Input2.2 | length 877.8
  Top Layer w10: U10_Input2.2 3239.95,3728 3425,3728 3445.57,3748.57 3445.57,4070 3446.57,4071 3573.82,4071 R21_Input2.2
BTN_Input3_N: R21_Input3.2 U10_Input3.2 | length 652.8
  Top Layer w10: v1(4045.57,3919) 4045.57,4038.05 4095.52,4088 4163.82,4088 4173.82,4078 R21_Input3.2
  Bottom Layer w10: U10_Input3.2 3826.43,3878.43 3867,3919 v1(4045.57,3919)
BTN_Input4_N: R21_Input4.2 U10_Input4.2 | length 704.6
  Top Layer w10: U10_Input4.2 4348.1,3937 4625,3937 4638,3950 4638,4100 4651,4113 4760.82,4113 4773.82,4100 R21_Input4.2
BTN_RC_Input1: C20_Input1.2 R20_Input1.1 SW20_Input1.2 U10_Input1.1 | length 1359.1
  Top Layer w10: U10_Input1.1 2531,3936.95 2531,3262.5 2515.5,3247 C20_Input1.2 ; SW20_Input1.2 2990.16,4007.56 3007.6,4025 R20_Input1.1
  Bottom Layer w10: U10_Input1.1 2530.95,3937 2822.43,3937 SW20_Input1.2
BTN_RC_Input2: C20_Input2.2 R20_Input2.1 SW20_Input2.2 U10_Input2.1 | length 1567.3
  Top Layer w10: U10_Input2.1 3049,3937.9 3049,3358 3100.67,3306.33 C20_Input2.2 ; SW20_Input2.2 3492.99,3946.51 3552,3887.5 3595.1,3887.5 3607.6,3900 R20_Input2.1
  Bottom Layer w10: U10_Input2.1 3130.95,3937 3422.43,3937 SW20_Input2.2
BTN_RC_Input3: C20_Input3.2 R20_Input3.1 SW20_Input3.2 U10_Input3.1 | length 1350.4
  Top Layer w10: U10_Input3.1 3731,3936.95 3731,3338 3700.67,3307.67 C20_Input3.2 ; SW20_Input3.2 4190.16,4007.56 4207.6,4025 R20_Input3.1
  Bottom Layer w10: U10_Input3.1 3730.95,3937 4022.43,3937 SW20_Input3.2
BTN_RC_Input4: C20_Input4.2 R20_Input4.1 SW20_Input4.2 U10_Input4.1 | length 1374.1
  Top Layer w10: R20_Input4.1 4807.6,4025 4790.16,4007.56 SW20_Input4.2 4692.99,3898.99 4645,3851 4645,3761 4646,3760 4795,3760 4893,3858 4893,4065 4892,4066 4875.16,4066 C20_Input4.2
  Bottom Layer w10: U10_Input4.1 4330.95,3937 4622.43,3937 SW20_Input4.2
D_OUT: U2.13 U2.14 | length 100
  Top Layer w10: U2.13 U2.14
DAC_BUF: R13A.2 U2.8 U2.9 | length 304.3
  Top Layer w10: R13A.2 v1(3719.57,1697.99) ; U2.8 U2.9
  Bottom Layer w10: v1(3719.57,1697.99) 3759.1,1697.99 U2.8
DAC_F: C17.2 R12A.1 U2.10 | length 1270.6
  Top Layer w10: v1(3434,1574) 3588,1574 3618.23,1604.23 R12A.1 ; C17.2 3550.67,1665.67 v1(3559,1674)
  Bottom Layer w10: v1(3434,1574) 3443,1583 3443,1639 3444,1640 3501.1,1640 U2.10 3839.53,1948.58 v1(3559,1674)
DRAIN: D5.1 J6.2 Q1.2 | length 829.3
  Top Layer w10: D5.1 2737.5,1478.82 2757,1498.32 2757,1672.69 Q1.2 2671.76,1757.93 2671.76,1836.76 2711.06,1876.06 J6.2
GATE: Q1.1 R15.1 R16.2 | length 1127.5
  Top Layer w10: Q1.1 2655.76,1673.93 2655.76,1922.26 2684.17,1950.67 2932.61,1950.67 2945.78,1937.5 R16.2 ; v1(2817.82,1719) 2962.5,1719 2979.56,1736.06 R15.1
  Bottom Layer w10: Q1.1 v1(2817.82,1719)
GND: C1.1 C2.1 C3.1 C4.1 C11.1 C12.1 C13.1 C14.1 C15.1 C16.1 C17.1 C20_Input1.1 C20_Input2.1 C20_Input3.1 C20_Input4.1 C21_Input1.1 C21_Input2.1 C21_Input3.1 C21_Input4.1 C23.1 C24.1 C30.1 C31.1 C32.1 C33.1 C34.1 C35.1 C36.1 C37.1 C38.1 C39.1 D2.2 D3.1 D6.2 J1.2 J2.1 J3.1 J4.2 J5.2 J7.4 J8.2 Q1.3 R7.1 R16.1 R31.1 R32.1 SW20_Input1.1 SW20_Input2.1 SW20_Input3.1 SW20_Input4.1 SW30.1 TP4.1 U1.2 U2.11 U3.1 U4.8 U4.23 U4.35 U4.47 U10_Input1.7 U10_Input2.7 U10_Input3.7 U10_Input4.7 | length 10789.2
  Top Layer w10: C3.1 1092,1342.95 1092,1369 1093,1370 1474.49,1370 TP4.1 1582,1428.9 1591.84,1438.74 C24.1 1653,1438.74 1698.27,1484.01 C12.1 1712.18,1439 1850,1439 1866.02,1462 ; J2.1 1241.81,3353.94 J8.2 1073,3185.13 1073,2971.5 1087.42,2957.08 1330.08,2957.08 1344.42,2971.42 C34.1 1405.69,2971.42 1421.77,2987.5 R31.1 R32.1 ; C31.1 R32.1 ; v1(1544.5,3851.41) 1548.68,3855.59 U4.8 1647.59,3855.59 ; C39.1 C38.1 C37.1 C36.1 C35.1 C33.1 ; U4.47 1677.8,4011 1656.5,3989.7 1656.5,3959.99 1673,3943.49 v1@1673,3877.5 ; v1(1682,3877.5) v1@1673,3877.5 ; D6.2 1740.37,1962.5 1756.69,1978.82 U3.1 ; U4.23 1854.96,3758 1855.96,3759 1986.64,3759 SW30.1 2035.2,3923.5 1985,3973.7 U4.35 ; C30.1 1860.91,2981.56 1842.35,2963 1794,2963 1793,2964 1793,3000 1793.35,3000.35 C32.1 C33.1 ; C13.1 1866.02,1462 ; C11.1 1948.35,1418.89 ; C1.1 2070.71,1462.5 ; C2.1 2270.16,1512.56 2270.16,1462.5 2257.45,1449.79 2083.42,1449.79 2070.71,1462.5 ; v1(2417,3339) 2417,3246.5 2437.5,3226 2466.89,3226 C21_Input1.1 C20_Input1.1 ; Q1.3 2802.43,1815.43 2804,1817 2912.78,1817 2945.78,1850 R16.1 ; C21_Input2.1 C20_Input2.1 3100.67,3219 3117,3219 3118,3220 3118,3320 3089.53,3348.47 U10_Input2.7 ; v1(3412.5,1624) 3516.89,1624 C16.1 C17.1 ; v1(3689.53,3181) 3666.89,3203.64 C21_Input3.1 C20_Input3.1 ; v1(4102,1624) 4102,1649.96 R7.1 ; J4.2 4557,2426.06 4567.63,2436.69 D3.1 4716.48,2430.09 4736,2427.09 4737,2399.29 C23.1 4812.66,2399.29 4825.87,2412.5 C14.1 C15.1 ; SW20_Input4.1 4841.38,3955.95 C21_Input4.1 C20_Input4.1 ; R32.1 1455.55,2909.45 1475,2890 1682,2890 1759.57,2967.57 C33.1 ; 1647.59,3855.59 v1@1673,3877.5 ; 1647.59,3855.59 1669.5,3877.5 v1@1673,3877.5 ; 1866.02,1462 1910.02,1418 1947.45,1418 1948.35,1418.89 ; 1948.35,1418.89 1948.35,1400 1960.85,1387.5 2058.21,1387.5 2070.71,1400 2070.71,1462.5
  Bottom Layer w10: J7.4 1428.44,3867.31 1428.44,3795.19 J3.1 1517.19,3745.69 1517.19,3775 1544.5,3802.31 v1(1544.5,3851.41) ; D2.2 1600.64,1812.37 1681.88,1812.37 D6.2 ; v1(1682,3877.5) 1750.5,3809 1895.56,3809 1897,3807.56 SW30.1 ; v1(2417,3339) 2456.43,3378.43 U10_Input1.7 ; SW20_Input1.1 2972.55,3728 3413.43,3728 SW20_Input2.1 ; v1(3412.5,1624) 3425,1624 3427,1626 3427,1796 3450,1819 ; v1(3689.53,3181) U10_Input3.7 ; U2.11 3580.1,1819 3450,1819 ; v1(4102,1624) 3460,1624 3459,1623 3459,1299.5 3437.5,1278 3387.5,1278 3371,1294.5 3371,1802.5 3387.5,1819 3450,1819
I2C_SCL: J3.3 U4.42 | length 349
  Top Layer w10: v1(1741.5,3982.5) 1776.22,4017.22 U4.42
  Bottom Layer w10: J3.3 1536.12,3930.7 1552.79,3930.7 1582.08,3959.99 1718.99,3959.99 v1(1741.5,3982.5)
I2C_SDA: J3.4 U4.43 | length 333.3
  Top Layer w10: J3.4 1568.5,4097 1755.54,4097 1756.54,4096 U4.43
LED3: D6.1 R14.1 | length 2022.4
  Top Layer w10: R14.1 1899.8,1465.2 v1(1922,1443)
  Bottom Layer w10: D6.1 1525.5,1639 1082,1639 1068,1625 1068,1233.5 1087.5,1214 1693,1214 v1(1922,1443)
LED_A: D7.1 R33.1 | length 1353.8
  Top Layer w10: R33.1 1556.89,2994 1557.89,2993 1626,2993 v1(1637,2982) ; D7.1 2148.25,3543.75 v1(2229.25,3462.75)
  Bottom Layer w10: v1(1637,2982) 1656.12,2962.88 1842.23,2962.88 1843.35,2964 1843.35,3076.85 v1(2229.25,3462.75)
LED_U: D7.2 U4.2 | length 2620.3
  Top Layer w10: v1(1446,4019) 1388,4077 1332,4077 1305,4050 1305,3700 1290,3685 1200,3685 1185,3700 1185,4092 1225,4132 2204.25,4132 2248.25,4088 D7.2 ; v1(1538,3956) 1555.7,3973.7 U4.2
  Bottom Layer w10: v1(1446,4019) 1498,3967 1527,3967 v1(1538,3956)
LEDA: D2.1 R1.1 | length 1049.7
  Top Layer w10: v1(2179,1741) 2198,1722 2198,1512.56 R1.1
  Bottom Layer w10: D2.1 1516.64,1828.37 2106.13,1828.37 2179,1755.5 v1(2179,1741)
NRST: C37.2 J7.5 R30.1 SW30.2 U4.7 | length 2868.9
  Top Layer w10: v1(1451,3944) 1451,3900 ; U4.7 1575.28,3877 1474,3877 1451,3900 ; C37.2 1658.23,3156.77 ; v1(1729.72,3306) 1659,3306 1635.5,3282.5 1635.5,3260.23 1658.23,3237.5 1658.23,3156.77 ; v1(1818,2988) 1827.13,2997.13 R30.1 ; v1(2105,3681.28) 2105,4004.56 v1(2108,4007.56) ; 1451,3900 1451,3364 1658.23,3156.77
  Bottom Layer w10: J7.5 1451,3944.75 v1(1451,3944) ; v1(1729.72,3306) 1818,3394.28 ; v1(1818,2988) 1818,3394.28 ; SW30.2 v1(2108,4007.56) ; v1(2105,3681.28) 1818,3394.28
OSC_IN: C38.2 U4.5 Y1.1 | length 1609
  Top Layer w10: v1(1599.45,3102) 1624.45,3077 C38.2 ; U4.5 1635.35,3914.65 v1(1648,3902)
  Bottom Layer w10: Y1.1 1335.3,3109 ; v1(1599.45,3102) 1592.45,3109 1335.3,3109 ; v1(1648,3902) 1648,3815.5 1662.5,3801 1694.5,3801 1708,3787.5 1708,3752 1654,3698 1654,3427 1550,3323 1550,3134 1537.5,3121.5 1347.8,3121.5 1335.3,3109
OSC_OUT: C39.2 U4.6 Y1.2 | length 2168.6
  Top Layer w10: v1(1420,3925) 1423,3922 1423,3261 1574,3110 1574,3101 ; v1(1497,3178) 1574,3101 ; v1(1541,3902) 1548.04,3894.96 U4.6 ; C39.2 1590.67,3064 1574,3080.67 1574,3101
  Bottom Layer w10: Y1.2 1201.83,2904.49 1155,2857.66 1074.75,2857.66 1073.41,2859 1073.41,2937.13 1075,2938.72 1085.72,2938.72 1104.66,2957.66 1155,2957.66 1212,3014.66 1212,3165 1225,3178 v1(1497,3178) ; v1(1420,3925) 1473,3872 1511,3872 v1(1541,3902)
PA1: J8.3 U4.11 | length 872.5
  Top Layer w10: U4.11 1639,3796.54 1640,3795.54 1640,3710 v1(1627,3697)
  Bottom Layer w10: J8.3 1269.06,3326.06 1548.54,3605.54 1625,3605.54 1638,3618.54 1638,3686 v1(1627,3697)
PA2: J8.4 U4.12 | length 1013
  Top Layer w10: v1(1575.5,3572) 1575.5,3776.85 U4.12
  Bottom Layer w10: J8.4 1113.94,3393.44 1073,3352.5 1073,3290.5 1087.5,3276 1279.5,3276 v1(1575.5,3572)
PA3: J8.5 U4.13 | length 1861.2
  Top Layer w10: U4.13 1658.11,3719.02 1656.95,3787.5 1670.47,3801.02 1688.02,3801.02 1813,3926 v1(1863.5,3926)
  Bottom Layer w10: J8.5 1077.85,3526.06 1041.41,3562.5 1041.41,4050 1059.82,4068.41 1168.42,4068.41 1216.61,4116.59 1715.19,4116.59 1813.81,4017.97 1813.81,3975.69 v1(1863.5,3926)
PA4: J8.6 U4.14 | length 813.7
  Top Layer w10: U4.14 1677.8,3770.8 v1(1683,3776)
  Bottom Layer w10: J8.6 1154.87,3667 1268.16,3667 1329.16,3606 1329.16,3587 1330.62,3585.54 1409,3585.54 1477,3653.54 1569,3653.54 1570.09,3654.62 1570.09,3730.59 1615.5,3776 v1(1683,3776)
PA8: J8.10 U4.29 | length 1006.1
  Top Layer w10: v1(1869,3850) 1874.59,3855.59 U4.29
  Bottom Layer w10: J8.10 1172.67,4026.06 1247.2,4100.59 1282.34,4099 1707,4099 1796.56,4009.44 1796.56,3940.22 1869,3867.78 v1(1869,3850)
PWM_DAC: R11.2 U4.18 | length 3516.8
  Top Layer w10: U4.18 1756.54,3684 1752,3679.46 1752,3492 1984,3260 1984,2597 v1(2461,2120) ; v1(3581,1919) 3581,1838 3685.79,1733.21 R11.2
  Bottom Layer w10: v1(2461,2120) 3230,2120 3512.1,1837.9 3562.5,1837.9 3581,1856.4 v1(3581,1919)
PWM_OUT: R15.2 U4.19 | length 2302.2
  Top Layer w10: U4.19 1776.22,3676 1770,3669.78 1770,3508 2016,3262 2016,3160 2979.56,2196.44 R15.2
PWM_R1: C16.2 R11.1 R12A.2 | length 899.7
  Top Layer w10: C16.2 C16.2@3516.89,1651 ; R12A.2 3618.23,1652 3627.5,1652 3628.5,1653 3628.5,1687.5 3614,1702 3546.5,1702 3516.89,1672.39 C16.2@3516.89,1651 ; R11.1 3685.79,1511.29 3662.5,1488 3400,1488 3387,1501 3387,1638 3400,1651 C16.2@3516.89,1651
SPI_MISO: J8.8 U4.16 | length 1049.2
  Top Layer w10: v1(1613,3647) 1701.67,3647 1717.17,3662.5 U4.16
  Bottom Layer w10: J8.8 1057.41,3769.54 1057.41,3580.59 1069,3569 1281.69,3569 1297.16,3553.54 1469.54,3553.54 1537.54,3621.54 1601,3621.54 1613,3633.54 v1(1613,3647)
SPI_MOSI: J8.9 U4.17 | length 1243.3
  Top Layer w10: U4.17 1736.85,3792.85 v1(1778,3834)
  Bottom Layer w10: J8.9 1164,3876 1385,3876 1411,3850 1411,3738 1463.46,3685.54 1537,3685.54 1538.09,3686.62 1538.09,3758 1591,3810.91 1591,3925 1609.99,3943.99 1703.01,3943.99 1778,3869 v1(1778,3834)
SPI_SCK: J8.7 U4.15 | length 991.3
  Top Layer w10: v1(1614,3729) 1601.5,3716.5 1601.5,3673 1602.5,3672 1681.98,3672 1697.48,3687.5 U4.15
  Bottom Layer w10: J8.7 1073.41,3685.54 1073.41,3604.59 1093,3585 1299.16,3585 1314.62,3569.54 1425,3569.54 1493,3637.54 1585,3637.54 1586.09,3638.62 1586.09,3701.09 v1(1614,3729)
SWCLK: J7.3 U4.37 | length 1089.9
  Top Layer w10: v1(1258.34,3776) 1282.34,3800 1282.34,4056.96 1338.88,4113.5 1856.14,4113.5 1874.65,4095 U4.37
  Bottom Layer w10: v1(1258.34,3776) 1319.62,3776 J7.3
SWDIO: J7.2 U4.34 | length 850.6
  Top Layer w10: v1(1716.16,3882.84) 1787.34,3954.02 U4.34
  Bottom Layer w10: J7.2 1426.21,3669.54 1553,3669.54 1554.09,3670.62 1554.09,3750.02 1610.05,3805.98 1610.05,3912.55 1625.49,3927.99 1671.01,3927.99 v1(1716.16,3882.84)
UART_RX: J2.4 U4.31 | length 1455.7
  Top Layer w10: v1(1160,3807.75) 1160,4106 v1(1179,4125) ; v1(1887,3901) 1893.04,3894.96 U4.31
  Bottom Layer w10: v1(1160,3807.75) 1167.75,3800 1215.75,3800 J2.4 ; v1(1179,4125) 1187,4133 1917,4133 1919,3933 v1(1887,3901)
UART_TX: J2.5 U4.30 | length 1012.4
  Top Layer w10: J2.5 1201,3966.88 1201,4050 1226,4075 v1(1257,4075) ; v1(1816.5,3875.28) U4.30
  Bottom Layer w10: v1(1257,4075) 1264.8,4082.8 1633.39,4082.8 1708.69,4007.5 1753,4007.5 1766.5,3994 1766.5,3925.28 v1(1816.5,3875.28)
V5A: JP2.1 U1.3 | length 903.8
  Bottom Layer w10: U1.3 1366.61,1876.06 JP2.1
VDDA: C35.2 C36.2 FB1.2 U4.9 | length 1162.9
  Top Layer w10: FB1.2 v1(1523.11,3077) ; U4.9 v1(1673,3835.91) ; v1(1673,3270) 1692.01,3250.99 v1(1692.01,3077) C36.2 C35.2
  Bottom Layer w10: v1(1523.11,3077) v1(1692.01,3077) ; v1(1673,3270) 1673,3685 1724,3736 1724,3800 1688.09,3835.91 v1(1673,3835.91)
VIN0: D1.1 D5.2 J1.1 J6.1 TP1.1 | length 2141.8
  Top Layer w10: TP1.1 D1.1
  Bottom Layer w10: D1.1 2049.62,1578.82 2053.59,1574.85 2109.06,1574.85 2324.13,1789.93 J1.1 2414,1876.06 2428.57,1890.63 D5.2 2644.69,1765 2864.96,1765 J6.1
VIND: C1.2 C2.2 D1.2 U1.1 | length 1699.2
  Top Layer w10: D1.2 1119.06,1923.62 U1.1 ; v1(2082,1600) 2129.77,1552.23 C1.2 2129.77,1490 2244,1490 2254,1500 2254,1550 2268,1564 2290,1564 2304,1550 2304,1512.56 C2.2
  Bottom Layer w10: U1.1 1401.52,1728.48 1418.62,1711.38 1560.38,1711.38 1597.88,1748.88 1597.88,1781.75 1612.5,1796.37 1662.5,1796.37 1687,1771.87 1687,1712.5 1799.5,1600 v1(2082,1600)
VOUT: J5.1 R13A.1 | length 1471.2
  Top Layer w10: R13A.1 3719.57,1557.93 3737.5,1540 4300,1540 4319,1559 v1(4319,2258.84)
  Bottom Layer w10: v1(4319,2258.84) J5.1
VREF: C23.2 R6.1 R7.2 U2.5 | length 2247
  Top Layer w10: R6.1 4021,1666 4022,1667 4131,1667 4132,1666 ; R7.2 4132,1649.96 4132,1666 ; v1(4132,1944) 4132,1666 ; v1(4725,2458.35) C23.2
  Bottom Layer w10: U2.5 3681.1,2120 3956,2120 ; v1(4132,1944) 3956,2120 ; v1(4725,2458.35) 4725,2209 4636,2120 3956,2120
VREF_BUF: U2.6 U2.7 U2.12 | length 656
  Top Layer w10: U2.7 U2.6
  Bottom Layer w10: U2.6 3499,1918.95 3499,2005.5 3512.5,2019 3546,2019 3705.43,2178.43 U2.12
pads on no net: J2.2 J2.6 U4.3 U4.4 U4.21 U4.22 U4.32 U4.33 U4.38 U4.39 U4.40 U4.41 U4.45 U4.46 U10_Input1.3 U10_Input1.4 U10_Input1.5 U10_Input1.6 U10_Input1.8 U10_Input1.9 U10_Input1.10 U10_Input1.11 U10_Input1.12 U10_Input1.13 U10_Input2.3 U10_Input2.4 U10_Input2.5 U10_Input2.6 U10_Input2.8 U10_Input2.9 U10_Input2.10 U10_Input2.11 U10_Input2.12 U10_Input2.13 U10_Input3.3 U10_Input3.4 U10_Input3.5 U10_Input3.6 U10_Input3.8 U10_Input3.9 U10_Input3.10 U10_Input3.11 U10_Input3.12 U10_Input3.13 U10_Input4.3 U10_Input4.4 U10_Input4.5 U10_Input4.6 U10_Input4.8 U10_Input4.9 U10_Input4.10 U10_Input4.11 U10_Input4.12 U10_Input4.13

## Polygon pours and split planes (outlines as drawn)
GND on Bottom Layer "GND_L02_P000" (solid, pour order 0): 1050,1050 4890,1050 4890,4100 1050,4100
GND on Top Layer "GND_L01_P001" (solid, pour order 1): 1050,1050 4890,1050 4890,4100 1050,4100